# Altium PCB ice40.PcbDoc
Units mil, origin at the board's own origin, x right, y up, seen from the top; angles counter-clockwise.
Board outline 2053 x 2556 mil, 2 copper layers (Top Layer, Bottom Layer); 19 components, 18 nets, 134 pads, 50 vias.
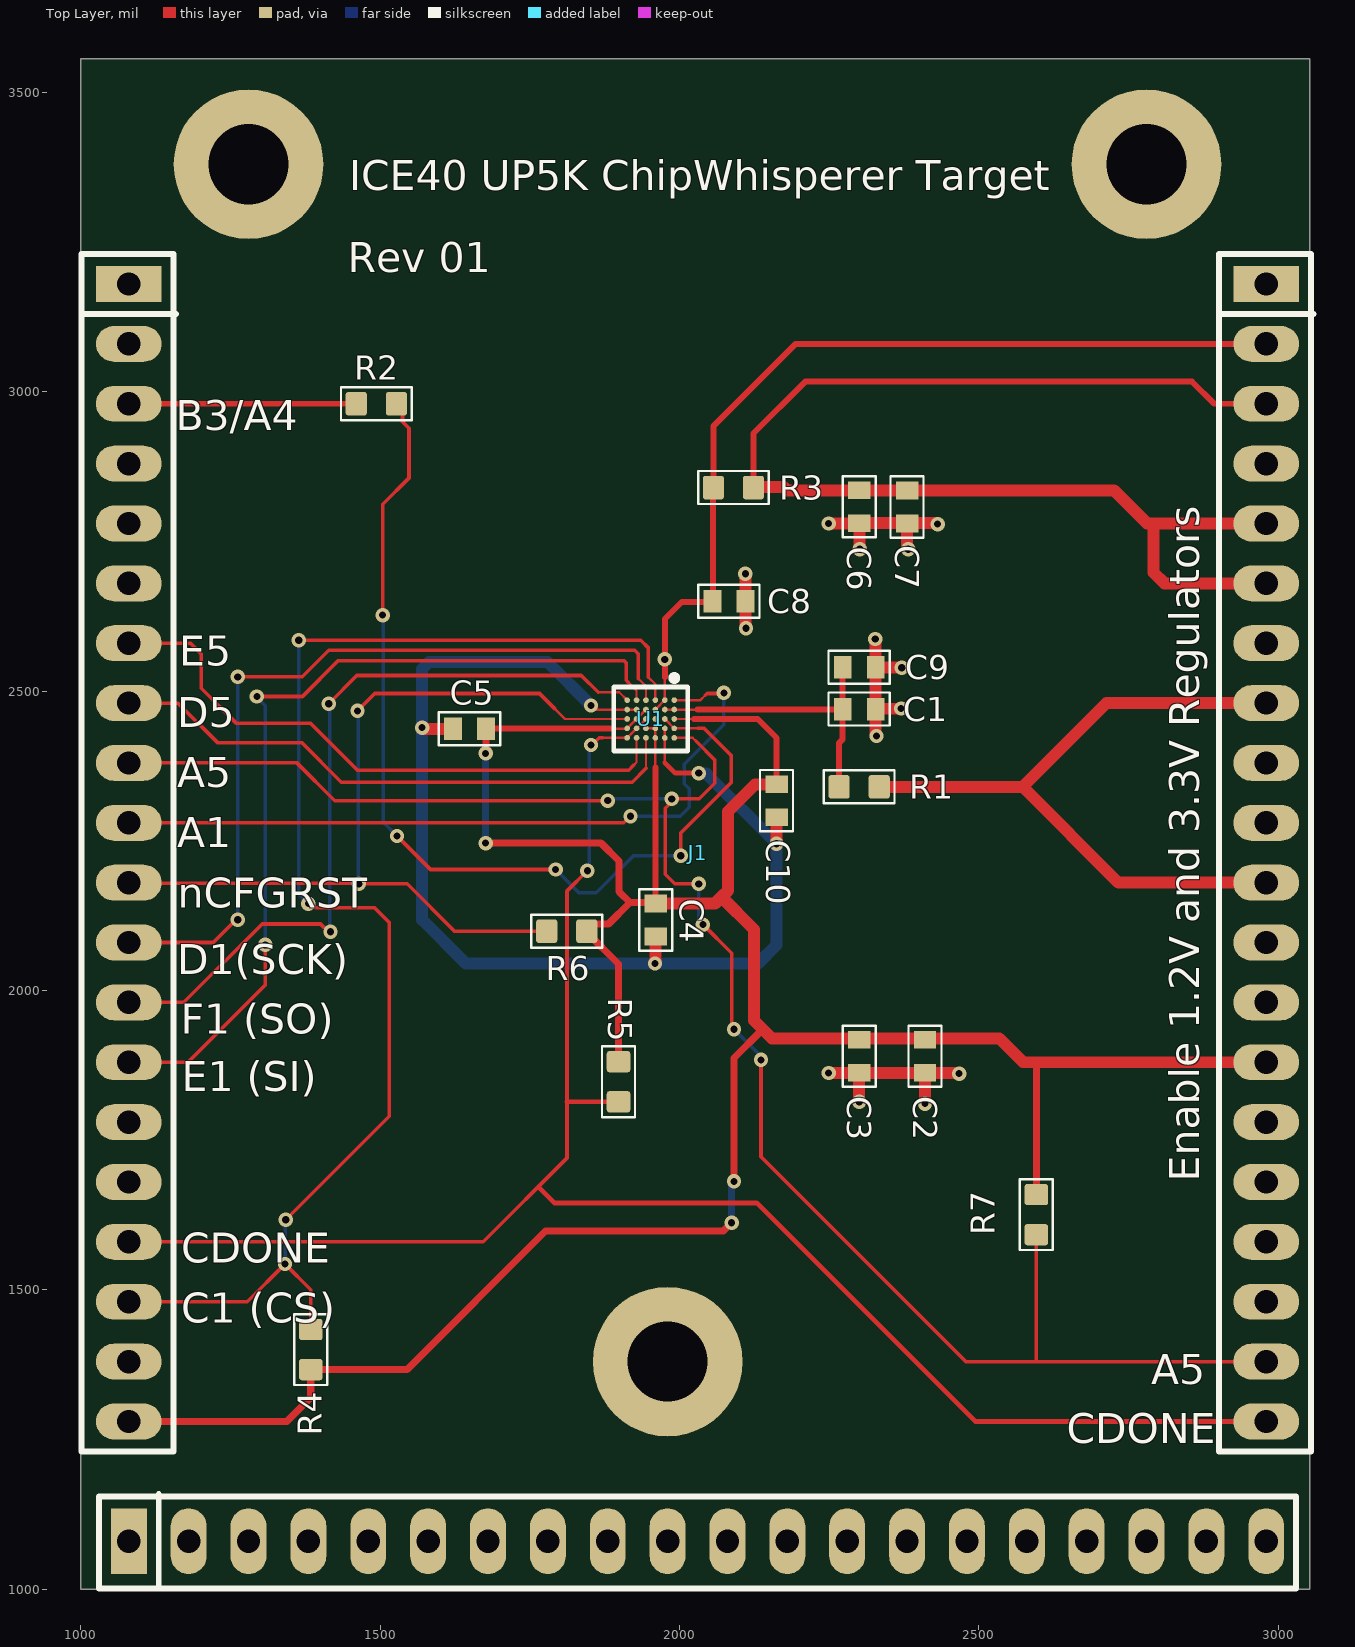
[diagram p0: Top Layer view]
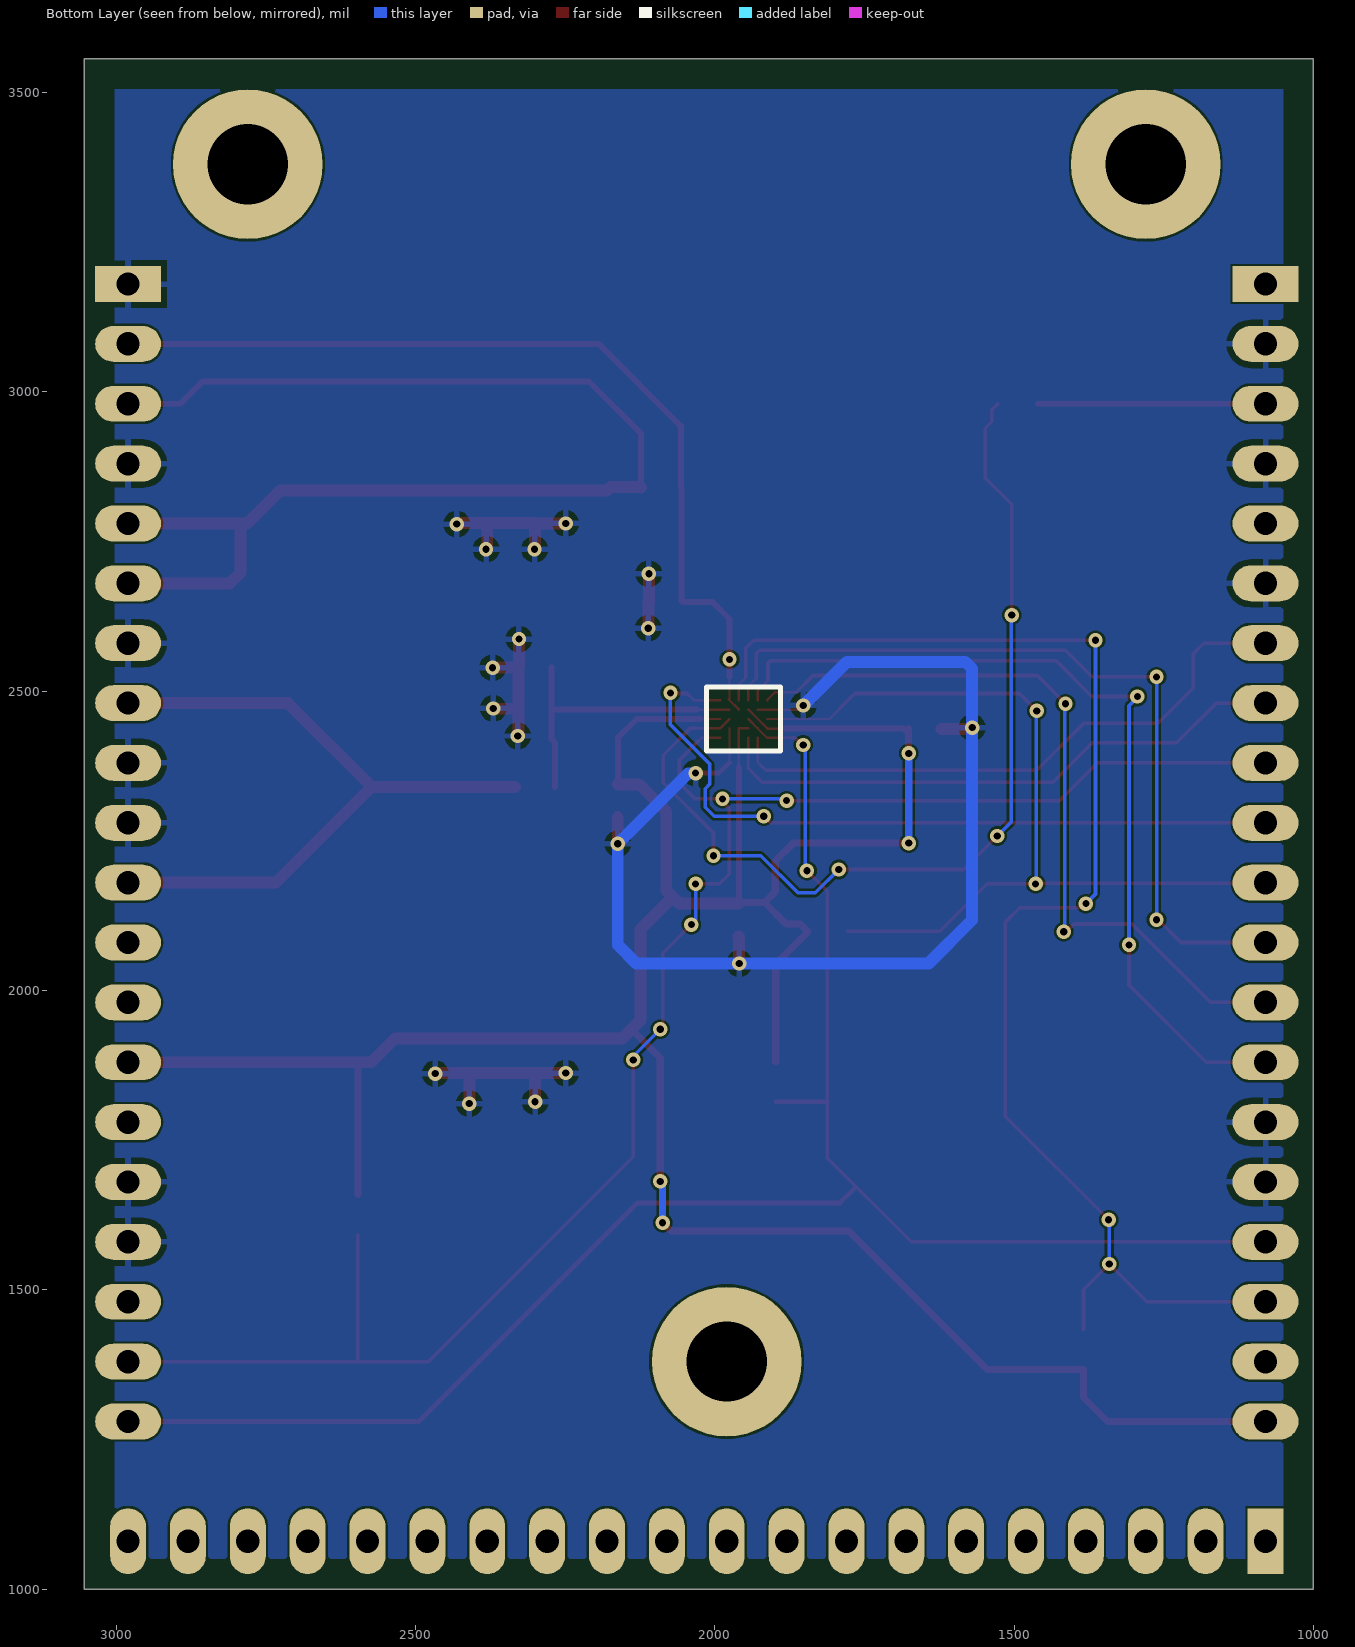
[diagram p1: Bottom Layer view, seen from below]

## Layer stack, top to bottom
Top Solder: solder mask 0.4, Solder Resist, Dk 3.5
Top Layer: signal copper 1.4
Dielectric 1: dielectric 12.6, FR-4, Dk 4.8
Bottom Layer: signal copper 1.4
Bottom Solder: solder mask 0.4, Solder Resist, Dk 3.5

## Board outline
1000,1000 3053,1000 3053,3556 1000,3556

## Design rules (kind name [scope] priority, off if disabled: settings)
BoardOutlineClearance [All] p1: gap=10 ignorepadtopadclearanceinfootprint=FALSE except(0: Arc-SplitContinuation Track-SplitContinuation SMDPad-SplitContinuation THPad-SplitContinuation Via-SplitContinuation Fill-SplitContinuation Poly-SplitContinuation Region-SplitContinuation Text-OutlineEdge Text-CavityEdge Text-CutoutEdge Text-SplitBarrior Text-SplitContinuation; 50: Fill-OutlineEdge Fill-CavityEdge Fill-CutoutEdge Fill-SplitBarrior Poly-OutlineEdge Poly-CavityEdge Poly-CutoutEdge Poly-SplitBarrior Region-OutlineEdge Region-CavityEdge Region-CutoutEdge Region-SplitBarrior)
Clearance [All] p1: gap=4 ignorepadtopadclearanceinfootprint=FALSE except(0: Arc-Hole Track-Hole SMDPad-Hole THPad-Hole Via-Hole Fill-Hole Poly-Hole Region-Hole Text-Hole; 6: Arc-Via Track-Via SMDPad-Via THPad-Via Via-Via)
PolygonConnect [All] p1: connectstyle=Relief reliefconductorwidth=10 reliefentries=4 polygonreliefangle="90 Angle" airgapwidth=10
RoutingVias [All] p1: holewidth=28 width=50 viastyle="Through Hole" minholewidth=12 minwidth=24 maxholewidth=28 maxwidth=50
SolderMaskExpansion [All] p1: expansion=4 istentingtop=FALSE
Width [All] p1: maxlimit=50 minlimit=4 preferedwidth=10 minimp=50.000000 maximp=50.000000 favimp=50.000000
30 further rules are at their usual default settings.

## Components (designator, comment, footprint, x,y, rotation, side; value= is the part's Value field where it differs from the comment)
C1 "100n" CAPC0603_M 2300,2470 r0 top
C2 "2u2" CAPC0603_M 2410,1890 r270 top
C3 "100n" CAPC0603_M 2300,1890 r270 top
C4 "100n" CAPC0603_M 1960,2117.56 r270 top
C5 "100n" CAPC0603_M 1649,2437 r180 top
C6 "2u2" CAPC0603_M 2300,2808 r270 top
C7 "100n" CAPC0603_M 2380,2807.56 r270 top
C8 "DNM" CAPC0603_M 2082.44,2650 r0 top
C9 "DNM" CAPC0603_M 2300,2540 r0 top
C10 "100n" CAPC0603_M 2162,2317 r270 top
J1 "CW308_TARGETCON" CW308_TBOARD_CONN 1080,3180 r0 top locked
R1 "100R" RESC1608X55N 2300,2340 r180 top
R2 "10R" RESC1608X55N 1493.46,2980 r180 top
R3 "10R" RESC1608X55N 2090,2840 r180 top
R4 "1k" RESC1608X55N 1384,1400 r90 top
R5 "1k" RESC1608X55N 1898,1847.46 r270 top
R6 "1k" RESC1608X55N 1811.54,2099 r180 top
R7 "1k" RESC1608X55N 2596,1625.46 r90 top
U1 "iCE40UP5K-UWG30ITR" FP-WLSC-30-MFG 1951.75,2453.43 r270 top

## Footprints (in the part's own frame and the unit in brackets; to place one, negate y for a bottom-side part, rotate by r counter-clockwise, add the part's x,y. Pads: shape width x height; smd on the part's side, far side on the other; paste and mask are expansions set on the pad)
CAPC0603_M [mm]
  rect 0.75x0.95 smd: 1(-0.7,0) 2(0.7,0)
  silkscreen extent -1.3,-0.7 1.3,0.7, body extent -0.85,-0.45 0.85,0.45, height 0.9
CW308_TBOARD_CONN [mil]
  rect 110x60 hole 39: A1(0,0) C1(1900,0)
  oval 110x60 hole 39: A2(0,-100) A3(0,-200) A4(0,-300) A5(0,-400) A6(0,-500) A7(0,-600) A8(0,-700) A9(0,-800) A10(0,-900) A11(0,-1000) A12(0,-1100) A13(0,-1200) A14(0,-1300) A15(0,-1400) A16(0,-1500) A17(0,-1600) A18(0,-1700) A19(0,-1800) A20(0,-1900) C2(1900,-100) C3(1900,-200) C4(1900,-300) C5(1900,-400) C6(1900,-500) C7(1900,-600) C8(1900,-700) C9(1900,-800) C10(1900,-900) C11(1900,-1000) C12(1900,-1100) C13(1900,-1200) C14(1900,-1300) C15(1900,-1400) C16(1900,-1500) C17(1900,-1600) C18(1900,-1700) C19(1900,-1800) C20(1900,-1900)
  rect 60x110 hole 39: B1(0,-2100)
  oval 60x110 hole 39: B2(100,-2100) B3(200,-2100) B4(300,-2100) B5(400,-2100) B6(500,-2100) B7(600,-2100) B8(700,-2100) B9(800,-2100) B10(900,-2100) B11(1000,-2100) B12(1100,-2100) B13(1200,-2100) B14(1300,-2100) B15(1400,-2100) B16(1500,-2100) B17(1600,-2100) B18(1700,-2100) B19(1800,-2100) B20(1900,-2100)
  round 250 hole 134: MH1(200,200) MH2(900,-1800) MH2(1700,200)
  silkscreen extent -79,-2179 1979,50, body extent -50,-2149 1950,50, height 48
FP-WLSC-30-MFG [mm]
  round 0.24 smd paste+0 mask+0: A1(-0.8,1) A2(-0.4,1) A3(0,1) A4(0.4,1) A5(0.8,1) B1(-0.8,0.6) B2(-0.4,0.6) B3(0,0.6) B4(0.4,0.6) B5(0.8,0.6) C1(-0.8,0.2) C2(-0.4,0.2) C3(0,0.2) C4(0.4,0.2) C5(0.8,0.2) D1(-0.8,-0.2) D2(-0.4,-0.2) D3(0,-0.2) D4(0.4,-0.2) D5(0.8,-0.2) E1(-0.8,-0.6) E2(-0.4,-0.6) E3(0,-0.6) E4(0.4,-0.6) E5(0.8,-0.6) F1(-0.8,-1) F2(-0.4,-1) F3(0,-1) F4(0.4,-1) F5(0.8,-1)
  silkscreen extent -1.86,-1.57 1.36,1.57, body extent -1.57,-1.78 1.57,1.78, height 0.25
RESC1608X55N [mm] "Chip Resistor, Body 1.6x0.8mm, EIA 0603, IPC Medium Density"
  round 0.254 on Mech15: 0(0,0)
  rrect25% 0.9x1 smd: 1(-0.85,0) 2(0.85,0)
  Top Layer pour cut-out: -0.6,0.5 0.6,0.5 0.6,-0.5 -0.6,-0.5
  silkscreen extent -1.5,-0.7 1.5,0.7, body extent -0.87,-0.47 0.88,0.48, height 0.54

## Part data
C1 C3 C4 C5 C7 C10: library part CCHIP-100n-0603, "100n, 0603", Case-EIA=0603, Case-Metric=1608, Manufacture 1=Kemet, Manufacture Part Number 1=C0603C104K5RACTU, Rated Voltage=50VDC, Supplier Part Number 1=399-5089-2-ND, Component Group=Capacitor, Component Type=Standard, Mounting Technology=SMT, Part Number=CCHIP-100n-0603, Pin Count=2, Supplier 1=Digi-Key
C2 C6: library part CCHIP-2u2-0603, "2u2, 0603", Case-EIA=0603, Case-Metric=1608, Manufacture 1=Samsung, Manufacture Part Number 1=CL10B225KP8NNNC, Rated Voltage=10VDC, Supplier Part Number 1=1276-1134-1-ND, Component Group=Capacitor, Component Type=Standard, Mounting Technology=SMT, Part Number=CCHIP-2u2-0603, Pin Count=2, Supplier 1=Digi-Key
C8 C9: library part CCHIP-DNM-0603, "DNM, 0603", Case-EIA=0603, Component Group=Capacitor, Component Type=Standard, Mounting Technology=SMT, Part Number=CCHIP-DNM-0603, Pin Count=2
J1: library part CW308_TBOARD, "CW308 \"Standard\" Target Board Connector", Component Group=Mechanical, Component Type=Standard, Mounting Technology=Through-hole, Part Number=CW308_TBOARD, Pin Count=60, Pitch=2.54mm
R1: library part RCHIP-100R-0603, "100R res, 0603, 1%, 1/10W", Case-EIA=0603, Case-Metric=1608, Manufacture 1=Yageo, Manufacture Part Number 1=RC0603FR-07100RL, Rated Power=0.1W, Rated Voltage=75VDC, Supplier Part Number 1=311-100HRCT-ND, Temperature Range="-55C to 155C", Tolerance=1%, Component Group=Resistor, Component Type=Standard, Mounting Technology=SMT, Part Number=RCHIP-100R-0603, Pin Count=2, Supplier 1=Digi-Key
R2 R3: library part RCHIP-10R-0603, "10R res, 0603, 1%, 1/10W", Case-EIA=0603, Case-Metric=1608, Manufacture 1=Yageo, Manufacture Part Number 1=RC0603FR-0710RL, Rated Power=0.1W, Rated Voltage=75VDC, Supplier Part Number 1=311-10.0HRCT-ND, Temperature Range="-55C to 155C", Tolerance=1%, Component Group=Resistor, Component Type=Standard, Mounting Technology=SMT, Part Number=RCHIP-10R-0603, Pin Count=2, Supplier 1=Digi-Key
R4 R5 R6 R7: library part RCHIP-1K-0603, "1k res, 0603, 1%, 1/10W", Case-EIA=0603, Case-Metric=1608, Manufacture 1=Yageo, Manufacture Part Number 1=RC0603FR-071KL, Rated Power=0.1W, Rated Voltage=75VDC, Supplier Part Number 1=311-1.00KHRCT-ND, Temperature Range="-55C to 155C", Tolerance=1%, Component Group=Resistor, Component Type=Standard, Mounting Technology=SMT, Part Number=RCHIP-1K-0603, Pin Count=2, Supplier 1=Digi-Key
U1: library part CMP-17932-000002-1, "CE40-ULTRAPLUS, 5280 LUTS, 1.2V", Frequency=185MHz, Manufacturer="Lattice Semiconductor", Max Junction Temp=+100°C, Max Supply Voltage=3.46V, Min Supply Voltage=1.14V, Package=WLSC-30, Temperature="-40°C to +100°C", Temperature Range Low=-40°C, Automotive=No, Category=IC, ComponentLink2Description=Datasheet, ComponentLink2URL=http://www.latticesemi.com/view_document?document_id=51968, Device Class L1="Integrated Circuits (ICs)", Device Class L2="Embedded Processors and Controllers", Device Class L3="FPGAs - Field Programmable Gate Arrays", Digikey Description="CE40-ULTRAPLUS, 5280 LUTS, 1.2V", Footprint Url=http://www.latticesemi.com/view_document?document_id=213, Height=0.6mm, Ipc Land Pattern Name=BGA30N40P5X6_253X211X60, Lead Free=Yes, Manufacturer Part Number=iCE40UP5K-UWG30ITR, Number Of I/Os=21, Number Of Logic Blocks=660, Number Of Logic Elements Cells=5280, Octopart=https://octopart.com/ice40up5k-uwg30itr-lattice+semiconductor-75367085, Propagation Delay=9ns, Ram Size=1024Kbits, RoHS=TRUE, Standoff Height=0.14mm, Temperature Range High=+100°C

## Via types
v1: diameter 24, hole 12, Top Layer to Bottom Layer, tented both sides, 49 vias
v2: diameter 24, hole 12, Top Layer to Bottom Layer, 1 vias

## Nets (pads, with @x,y where several pads share a name; then routed paths per layer and width w, separated by ;. In a path a pad name is that pad's centre, name@x,y a point inside that pad or via, vN(x,y) a via of type N, cw(c..) or ccw(c..) an arc to the next point about the centre after c; other vN are vias at no path point)
CDONE: J1.A17 J1.C20 R5.2 U1.D3 U1.E4 U1.F5 | length 3066.6
  Top Layer w4: 1872,2421.93 U1.F5 U1.E4 U1.D3
  Top Layer w6: J1.A17 1672,1580 1812,1720 1812,1814 1812,2166 v1(1846,2200) ; v1(1852,2410) 1854,2410 1865.93,2421.93 1872,2421.93
  Top Layer w8: 1767,1669 1791,1645 2129,1645 2494,1280 J1.C20 ; 1812,1814 R5.2
  Bottom Layer w6: v1(1846,2200) 1849,2203 1849,2407 v1(1852,2410)
CLK: R2.1 U1.A4 U1.B3 | length 1636.4
  Top Layer w4: U1.B3 U1.A4 2030.5,2437.68
  Top Layer w6: v1(1504,2627) 1504,2812 1548,2856 1548,2939 1537.22,2949.78 1537.22,2969.71 R2.1 ; v1(1528,2258) 1584,2202 v1(1793,2202) ; v1(2002,2225) 2002,2263 2086,2347 2086,2393 2041.32,2437.68 2030.5,2437.68
  Bottom Layer w6: v1(1504,2627) 1505,2626 1505,2281 v1(1528,2258) ; v1(1793,2202) 1832,2163 1861,2163 1923,2225 v1(2002,2225)
CRST: J1.A11 R6.2 U1.F3 | length 1501.5
  Top Layer w4: 1791,2471 1808.57,2453.43 U1.F3
  Top Layer w6: J1.A11 1081,2179 1463,2179 v1(1464,2178) 1545,2178 1624,2099 R6.2 ; v1(1462,2467) 1491,2496 1766,2496 1791,2471
  Bottom Layer w6: v1(1462,2467) 1463,2466 1463,2179 v1(1464,2178)
CS: J1.A18 R4.2 U1.C1 | length 2333
  Top Layer w4: 1948,2523 1959.63,2511.37 U1.C1
  Top Layer w6: J1.A18 1278,1480 v1(1341,1543) 1384,1500 R4.2 ; v1(1342,1617) 1515,1790 1515,2113.49 1490.49,2138 1391.87,2138 1384.87,2145 v1(1380,2145) ; v1(1364,2585) 1935,2585 1948,2572 1948,2523
  Bottom Layer w6: v1(1341,1543) 1341,1613 1342,1614 v1(1342,1617) ; v1(1364,2585) 1364,2161 v1(1380,2145)
GND: C1.2 C2.2 C3.2 C4.2 C5.2 C6.2 C7.2 C8.2 C9.2 C10.2 J1.A2 J1.A4 J1.A6 J1.A15 J1.A16 J1.C1 J1.C4 J1.C7 J1.C9 J1.C10 J1.C16 J1.C17 U1.B4 U1.B5 U1.E2 U1.F2 | length 2996.1
  Top Layer w4: v1(1852,2476) 1852,2473 1855.83,2469.17 U1.F2 U1.E2 ; 1975.37,2380.63 U1.B5 U1.B4
  Top Layer w8: 1975.37,2380.63 1993,2363 v1(2032,2363)
  Top Layer w12: v1(1570,2439) v1@1572,2437
  Top Layer w20: v1(1570,2439) 1571.08,2439 1573.08,2437 C5.2 ; v1(1959,2045) 1959.5,2045.5 1959.5,2089.5 C4.2 ; v1(2110,2696) C8.2 2110.5,2649.5 2110.5,2605.5 v1(2111,2605) ; v1(2162,2245) C10.2 ; v1(2249,1862) 2249.22,1862.22 2299.78,1862.22 C3.2 ; v1(2249,2780) 2249.22,2780.22 2299.78,2780.22 C6.2 ; v1(2300,1814) C3.2 ; v1(2301,2737) 2300.5,2737.5 2300.5,2779.94 C6.2 ; v1(2327,2587) 2327.28,2586.72 2327.28,2540.28 C9.2 ; v1(2329,2425) 2329,2426.08 2327.56,2427.52 C1.2 ; v1(2370,2471) 2369.5,2470.5 2328.06,2470.5 C1.2 ; v1(2371,2539) 2370.5,2539.5 2328.06,2539.5 C9.2 ; C7.2 2380,2740.08 2382,2738.08 v1(2382,2737) ; v1(2410,1811) C2.2 ; v1(2431,2779) 2429.92,2779 2428.48,2780.44 C6.2 ; v1(2467,1861) 2465.92,1861 2464.48,1862.44 C2.2 ; C3.2 C2.2 ; C1.2 C9.2
  Bottom Layer w20: v1(1852,2476) 1779,2549 1581.72,2549 1570,2537.28 v1(1570,2439) 1570,2118 1643,2045 v1(1959,2045) 2131,2045 2162,2076 v1(2162,2245) 2044.77,2362.23 2032.77,2362.23 v1(2032,2363)
GPIO1: J1.A7 U1.E5 | length 1015.6
  Top Layer w4: 1923,2376 1928.13,2381.13 U1.E5
  Top Layer w6: J1.A7 1183,2580 1201,2562 1201,2505 1260,2446 1384,2446 1462,2368 1915,2368 1923,2376
GPIO2: J1.A8 U1.D5 | length 979.1
  Top Layer w4: 1943.88,2370.88 U1.D5
  Top Layer w6: J1.A8 1162,2480 1228,2414 1369,2414 1435,2348 1921,2348 1943.88,2370.88
GPIO3: J1.A9 J1.C19 R7.1 U1.A5 | length 3029.2
  Top Layer w4: U1.A5 2022.07,2421.93 2028,2416
  Top Layer w6: J1.A9 1361,2380 1424,2317 v1(1880,2317) ; 2028,2416 2059,2385 2059,2346 2033,2320 v1(1987,2320) 1987,2315.13 1976,2304.13 1976,2194 1992,2178 v1(2032,2178) ; v1(2039,2110) 2087,2062 2087,1939 v1(2091,1935) ; v1(2136,1884) 2136,1722 2478,1380 2596,1380 ; R7.1 2596,1380 ; J1.C19 2596,1380
  Bottom Layer w6: v1(1880,2317) 1883,2320 v1(1987,2320) ; v1(2032,2178) 2032,2117 v1(2039,2110) ; v1(2091,1935) 2136,1890 v1(2136,1884)
GPIO4: J1.A10 U1.A1 | length 1256.3
  Top Layer w4: U1.A1 2034.92,2484.92 2043.02,2493.02
  Top Layer w6: J1.A10 1907,2280 v1(1918,2291) ; 2043.02,2493.02 2046,2496 2073,2496 v1(2074,2497)
  Bottom Layer w6: v1(1918,2291) 2001,2291 2016,2306 2016,2337 2008,2345 2008,2378 2074,2444 v1(2074,2497)
NetC6_1: C6.1 C7.1 J1.C3 J1.C5 J1.C6 R3.1 | length 2159.1
  Top Layer w10: R3.1 2123.46,2930.46 2210,3017 2856,3017 2893,2980 J1.C3
  Top Layer w20: R3.1 2124.46,2841 2174,2841 2179.88,2835.12 C7.1 2725.88,2835.12 2781,2780 2795,2780 ; J1.C6 2810,2680 2792,2698 2792,2777 2795,2780 ; J1.C5 2795,2780
NetJ1_A3: J1.A3 R2.2 | length 380
  Top Layer w10: J1.A3 R2.2
SCK: J1.A12 U1.D1 | length 1375.8
  Top Layer w4: 1931,2521 1943.88,2508.12 U1.D1
  Top Layer w6: J1.A12 1221,2080 1259,2118 v1(1262,2118) ; v1(1261.98,2523.81) 1369.81,2523.81 1414,2568 1925,2568 1931,2562 1931,2521
  Bottom Layer w6: v1(1262,2118) v1(1261.98,2523.81)
SI: J1.A14 U1.E1 | length 1481.9
  Top Layer w4: 1914,2515 1928.13,2500.87 U1.E1
  Top Layer w6: J1.A14 1179,1880 1308,2009 v1(1308,2076) ; v1(1294,2491) 1370,2491 1430,2551 1907,2551 1911,2547 1911,2518 1914,2515
  Bottom Layer w6: v1(1294,2491) 1294,2489.3 1308,2475.3 v1(1308,2076)
SO: J1.A13 U1.F1 | length 1315.2
  Top Layer w4: 1864,2498 1899.3,2498 U1.F1
  Top Layer w6: J1.A13 1172,1980 1303,2111 1400.3,2111 1413.3,2098 v1(1417,2098) v1@1418,2097 ; v1(1414,2479) 1461,2526 1836,2526 1864,2498
  Bottom Layer w6: v1(1414,2479) 1415.5,2477.5 1415.5,2099.5 v1(1417,2098)
VCC: C2.1 C3.1 C4.1 C5.1 C10.1 J1.A20 J1.C14 R4.1 R5.1 R6.1 R7.2 U1.A3 U1.C4 U1.C5 U1.D2 U1.D4 U1.E3 U1.F4 | length 4943.7
  Top Layer w4: 1883.75,2437.43 1912.13,2437.43 U1.E3 U1.D2 ; U1.D4 U1.C4 U1.C5 1959.63,2372.3 ; U1.A3 2023.75,2453.43
  Top Layer w10: C5.1@1677.56,2430 1684.98,2437.43 1883.75,2437.43 ; 1959.63,2372.3 1959.63,2145.49 C4.1 ; 2023.75,2453.43 2130.57,2453.43 2162,2422 C10.1
  Top Layer w12: J1.A20 1344,1280 1384,1320 R4.1 1544.54,1366.54 1776,1598 2073,1598 v1(2087,1612) ; v1(1676,2246) 1869,2246 1899,2216 1899,2165 1917,2147 ; v1(1676,2396) 1676,2402 1676.56,2402.56 C5.1 ; R5.1 1898,2044.03 1845,2097.03 R6.1 1856.72,2110.72 1880.72,2110.72 1917,2147 ; C4.1@1959.63,2145.49 1958.12,2147 1917,2147 ; v1(2091,1681) 2091,1887 2139,1935 ; 2595,1880 2596,1879 R7.2
  Top Layer w20: C4.1 2059.12,2145.12 2070.06,2156.06 ; C10.1 2161.78,2344.33 2126.33,2344.33 2081,2299 2081,2167 2070.06,2156.06 ; J1.C14 2595,1880 2574,1880 2534,1920 2154,1920 2139,1935 2124,1950 2124,2102.12 2070.06,2156.06
  Bottom Layer w12: v1(1676,2246) v1(1676,2396) ; v1(2087,1612) 2087,1677 v1(2091,1681)
VCC1.2: J1.C8 J1.C11 R1.1 | length 1177.8
  Top Layer w20: R1.1 2573,2340 ; J1.C11 2733,2180 2573,2340 ; J1.C8 2713,2480 2573,2340
VCCINT: C8.1 J1.C2 R3.2 U1.B1 U1.C2 | length 1525.1
  Top Layer w4: U1.C2 U1.B1@1976.75,2486.3 ; U1.B1 1975.37,2523.13
  Top Layer w10: 1975.37,2523.13 v2(1975.37,2553) 1975.37,2620.37 2004,2649 2053.88,2649 C8.1 2055.71,2650.83 2055.71,2839.17 R3.2 2056.54,2942.54 2194,3080 J1.C2
VCCPLL: C1.1 C9.1 R1.2 U1.A2 U1.B2 | length 499.9
  Top Layer w4: U1.B2 U1.A2 2030,2469.17
  Top Layer w10: 2030,2469.17 2271.61,2469.17 C1.1 ; R1.2 2266.54,2413.54 2272.44,2419.44 C1.1 ; C9.1 C1.1
pads on no net: J1.A1 J1.A5 J1.A19 J1.B1 J1.B2 J1.B3 J1.B4 J1.B5 J1.B6 J1.B7 J1.B8 J1.B9 J1.B10 J1.B11 J1.B12 J1.B13 J1.B14 J1.B15 J1.B16 J1.B17 J1.B18 J1.B19 J1.B20 J1.C12 J1.C13 J1.C15 J1.C18 J1.MH1 J1.MH2 R1.0 R2.0 R3.0 R4.0 R5.0 R6.0 R7.0 U1.C3

## Polygon pours and split planes (outlines as drawn)
GND on Bottom Layer "GND_L02_P000" (solid, remove dead copper, pour order 0): 934,3615 963,3644 3133,3644 3133,942 3037,846 907,846 907,3583 915,3591

## Other copper
Multi-Layer:
  pour cut-out: 1890,2507 2014,2507 2014,2401 2013,2400 1894,2400

## Silkscreen, mask and mechanical layers (free items; w line width, h text height)
Top Overlay:
  text "ICE40 UP5K ChipWhisperer Target" at 1448,3337 h50
  text "Rev 01" at 1445.52,3199.26 h50
  text "B3/A4" at 1158,2936 h50
  text "E5" at 1164,2542 h50
  text "D5" at 1160.56,2439.45 h50
  text "A5" at 1160.56,2339.45 h50
  text "A1" at 1160.56,2239.45 h50
  text "nCFGRST" at 1161.56,2138.45 h50
  text "D1(SCK)" at 1161,2027 h50
  text "F1 (SO)" at 1167,1928 h50
  text "E1 (SI)" at 1168.63,1831.19 h50
  text "Enable 1.2V and 3.3V Regulators" at 2868,1680 h50 r90
  text "CDONE" at 1168,1545 h50
  text "C1 (CS)" at 1168,1445 h50
  text "A5" at 2787.56,1342.45 h50
  text "CDONE" at 2647,1244 h50
Bottom Overlay:
  lines w8: 1890,2400 1890,2507 2014,2507 2014,2400 1890,2400
Mechanical 1:
  the board outline again, w4